# Altium PCB PCB_V1.PcbDoc
Units mm, origin at the board's own origin, x right, y up, seen from the top; angles counter-clockwise.
Board outline 60 x 120 mm, 2 copper layers (Top Layer, Bottom Layer); 99 components, 59 nets, 368 pads, 0 vias.
Unrouted connection lines stored in the file: 219.
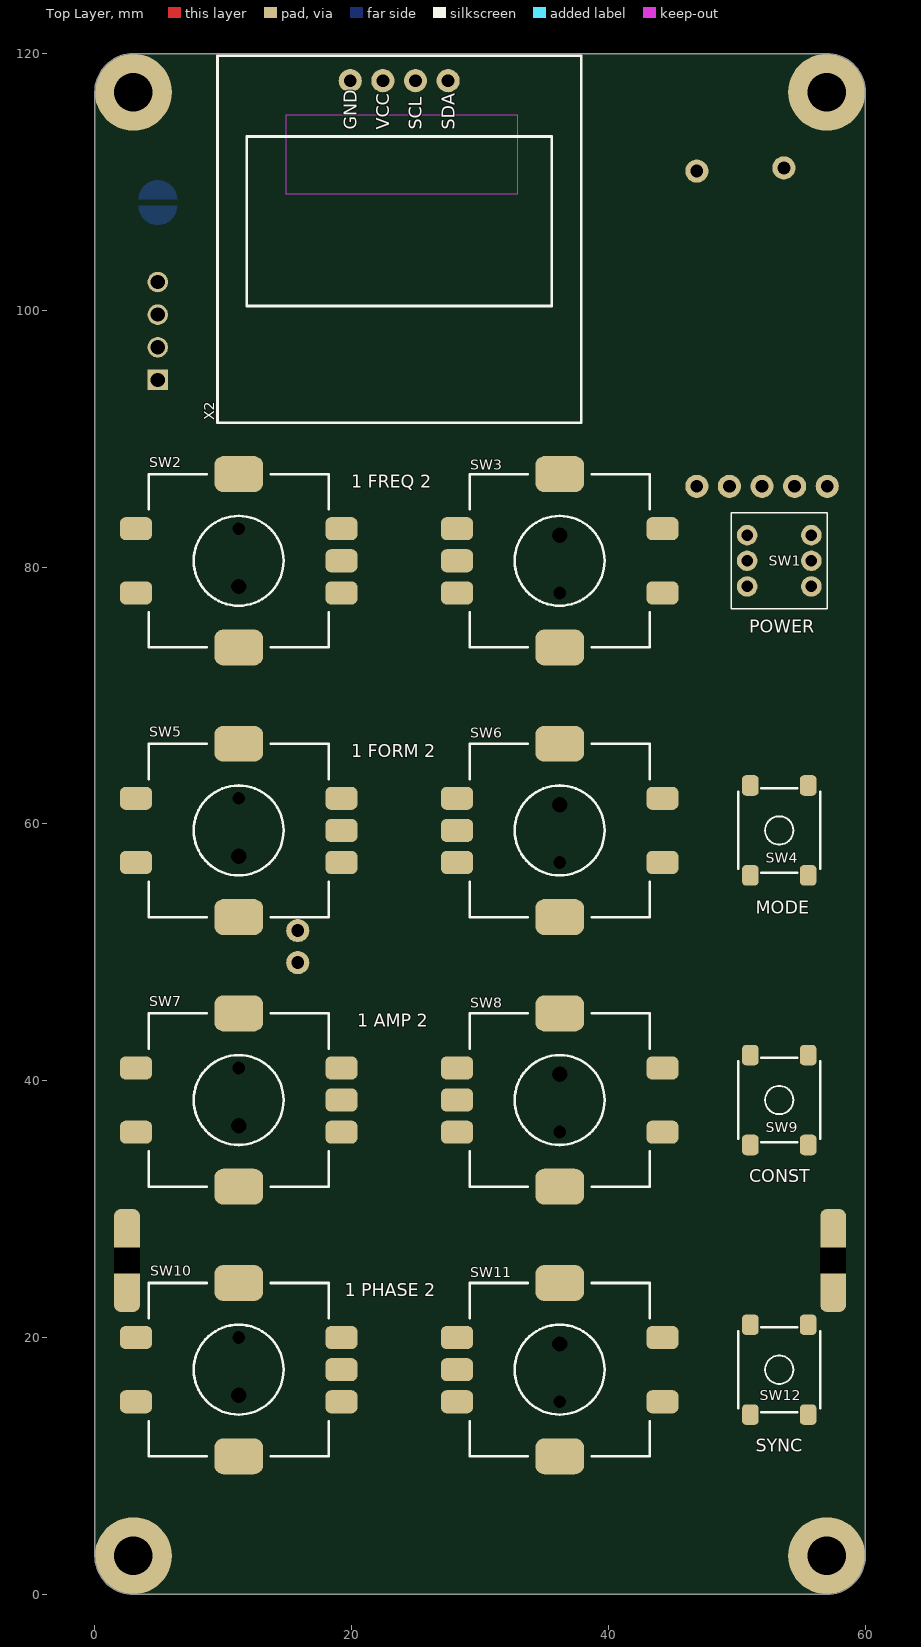
[diagram p0: Top Layer view]
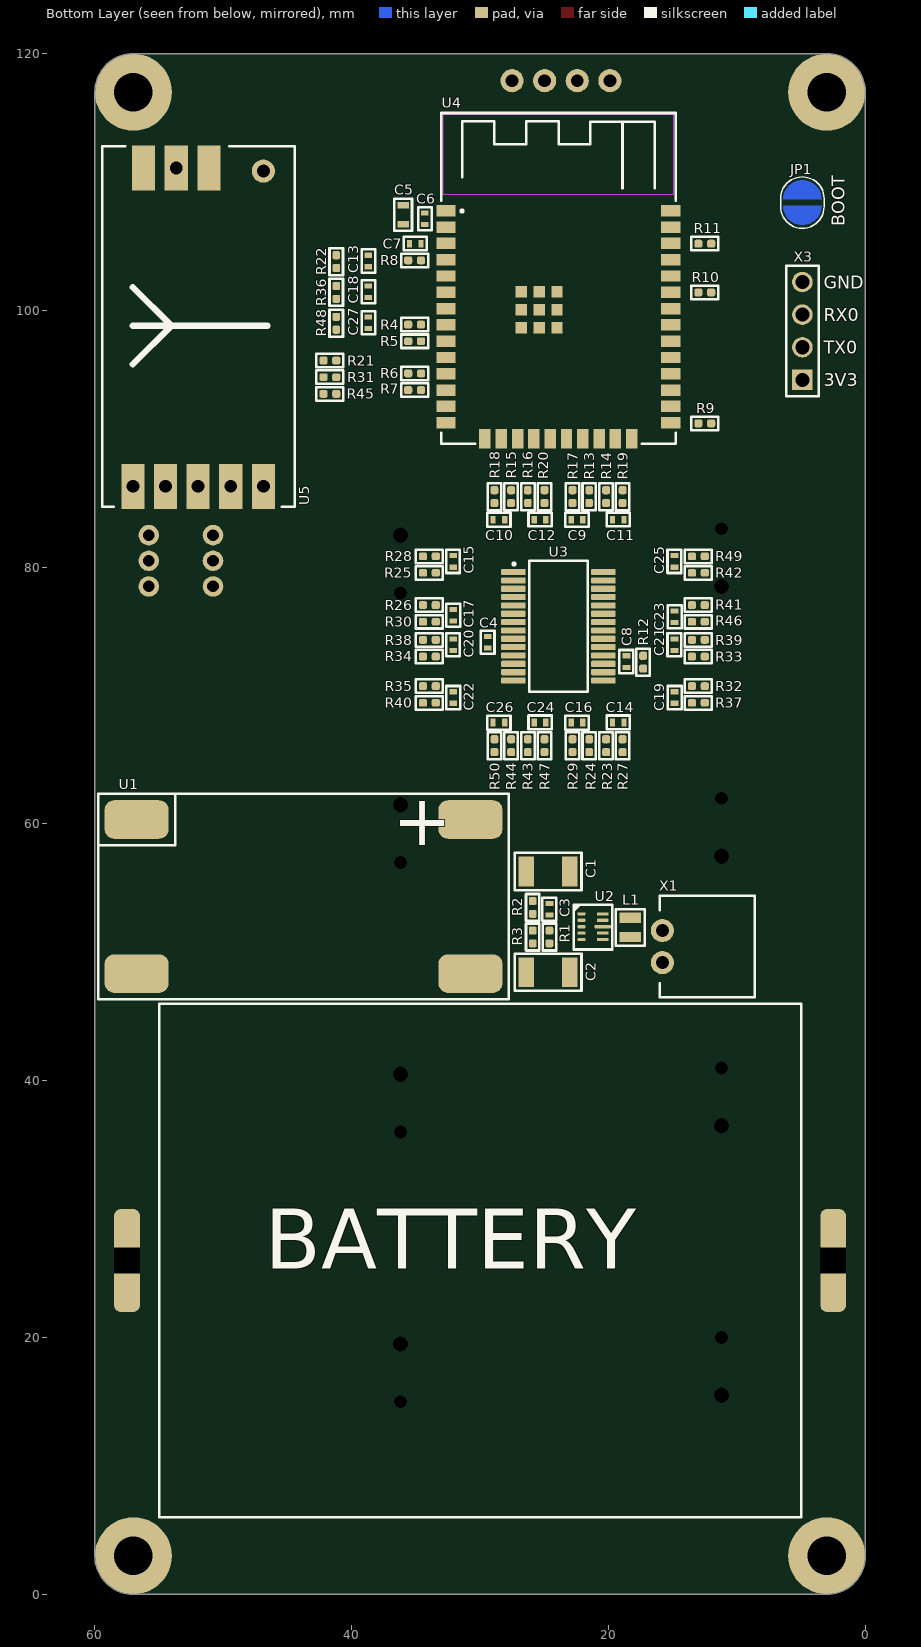
[diagram p1: Bottom Layer view, seen from below]

## Layer stack, top to bottom
Top Solder: solder mask 0.0102, Solder Resist, Dk 3.5
Top Layer: signal copper 0.0356
Dielectric 1: dielectric 0.32, FR-4, Dk 4.8
Bottom Layer: signal copper 0.0356
Bottom Solder: solder mask 0.0102, Solder Resist, Dk 3.5

## Board outline
0,3 0,117 cw(c3,117) 3,120 57,120 cw(c57,117) 60,117 60,3 cw(c57,3) 57,0 3,0 cw(c3,3)

## Design rules (kind name [scope] priority, off if disabled: settings)
Clearance [All] p1: gap=0.254 ignorepadtopadclearanceinfootprint=FALSE except(0: Arc-Hole Track-Hole SMDPad-Hole THPad-Hole Via-Hole Fill-Hole Poly-Hole Region-Hole Text-Hole; 0.1: SMDPad-SMDPad)
Height [All] p1: minheight=0 maxheight=50 prefheight=12.7
PolygonConnect [All] p1: connectstyle=Relief reliefconductorwidth=0.254 reliefentries=4 polygonreliefangle="90 Angle" airgapwidth=0.254
RoutingVias [All] p1: holewidth=0.711 width=1.27 viastyle="Through Hole" minholewidth=0.711 minwidth=1.27 maxholewidth=0.711 maxwidth=1.27
SolderMaskExpansion [All] p1: expansion=0.102 istentingtop=FALSE
Width [All] p1: maxlimit=0.2 minlimit=0.2 preferedwidth=0.2 minimp=50.000000 maximp=50.000000 favimp=50.000000
29 further rules are at their usual default settings.

## Components (designator, comment, footprint, x,y, rotation, side; value= is the part's Value field where it differs from the comment)
C1 "22u" C1210 24.7,56.35 r180 bottom
C2 "22u" C1210 24.7,48.5 r180 bottom
C3 "100n" C0402 24.6,52.9 r90 bottom
C4 "100n" C0402 29.4,73.7 r90 bottom
C5 "1u" C0603 36,108.2 r270 bottom
C6 "100n" C0402 34.3,107.6 r270 bottom
C7 "100n" C0402 35.5,105.2 r180 bottom
C8 "100n" C0402 18.6,72.2 r90 bottom
C9 "100n" C0402 22,83.7 r0 bottom
C10 "100n" C0402 28.081,83.7 r0 bottom
C11 "100n" C0402 19.7,83.7 r180 bottom
C12 "100n" C0402 25.781,83.7 r180 bottom
C13 "100n" C0402 38.7,104.3 r270 bottom
C14 "100n" C0402 19.7,67.9 r180 bottom
C15 "100n" C0402 32.1,80 r90 bottom
C16 "100n" C0402 22,67.9 r0 bottom
C17 "100n" C0402 32.1,76.7 r270 bottom
C18 "100n" C0402 38.7,101.9 r270 bottom
C19 "100n" C0402 14.85,70.3 r270 bottom
C20 "100n" C0402 32.1,73.5 r90 bottom
C21 "100n" C0402 14.85,73.5 r90 bottom
C22 "100n" C0402 32.1,70.3 r270 bottom
C23 "100n" C0402 14.85,76.6 r270 bottom
C24 "100n" C0402 25.781,67.9 r180 bottom
C25 "100n" C0402 14.85,80 r90 bottom
C26 "100n" C0402 28.081,67.9 r0 bottom
C27 "100n" C0402 38.7,99.5 r270 bottom
JP1 "NO" "jumper 3mm" 4.9,108.4 r270 bottom
L1 "0.47u 3A" "INDUCTOR 2x1.6mm VLS-CX" 18.3,52.7 r270 bottom
R1 "56k" R0402 24.6,51.2 r270 bottom
R2 "100k" R0402 25.9,53.5 r90 bottom
R3 "10k" R0402 25.9,51.2 r90 bottom
R4 "4.7k" R0402 35.1,98.9 r0 bottom
R5 "4.7k" R0402 35.1,97.6 r0 bottom
R6 "4.7k" R0402 35.1,95.1 r0 bottom
R7 "4.7k" R0402 35.1,93.8 r0 bottom
R8 "10k" R0402 35.1,103.9 r0 bottom
R9 "10k" R0402 12.5,91.2 r180 bottom
R10 "4.7k" R0402 12.5,101.4 r180 bottom
R11 "4.7k" R0402 12.5,105.2 r180 bottom
R12 "10k" R0402 17.3,72.6 r90 bottom
R13 "10k" R0402 21.5,85.5 r90 bottom
R14 "10k" R0402 20.185,85.5 r90 bottom
R15 "10k" R0402 27.581,85.5 r90 bottom
R16 "10k" R0402 26.281,85.5 r90 bottom
R17 "10k" R0402 22.8,85.5 r90 bottom
R18 "10k" R0402 28.881,85.5 r90 bottom
R19 "10k" R0402 18.9,85.5 r90 bottom
R20 "10k" R0402 24.981,85.5 r90 bottom
R21 "10k" R0402 41.7,96.1 r180 bottom
R22 "10k" R0402 41.2,103.8 r90 bottom
R23 "10k" R0402 20.185,66.1 r270 bottom
R24 "10k" R0402 21.5,66.1 r270 bottom
R25 "10k" R0402 33.95,79.565 r0 bottom
R26 "10k" R0402 33.95,77.05 r0 bottom
R27 "10k" R0402 18.9,66.1 r270 bottom
R28 "10k" R0402 33.95,80.85 r0 bottom
R29 "10k" R0402 22.8,66.1 r270 bottom
R30 "10k" R0402 33.95,75.75 r0 bottom
R31 "10k" R0402 41.7,94.8 r180 bottom
R32 "10k" R0402 13,70.74 r180 bottom
R33 "10k" R0402 13,73.04 r180 bottom
R34 "10k" R0402 33.95,73.04 r0 bottom
R35 "10k" R0402 33.95,70.74 r0 bottom
R36 "10k" R0402 41.2,101.4 r90 bottom
R37 "10k" R0402 13,69.44 r180 bottom
R38 "10k" R0402 33.95,74.34 r0 bottom
R39 "10k" R0402 13,74.34 r180 bottom
R40 "10k" R0402 33.95,69.44 r0 bottom
R41 "10k" R0402 13,77.05 r180 bottom
R42 "10k" R0402 13,79.565 r180 bottom
R43 "10k" R0402 26.281,66.1 r270 bottom
R44 "10k" R0402 27.581,66.1 r270 bottom
R45 "10k" R0402 41.7,93.5 r180 bottom
R46 "10k" R0402 13,75.75 r180 bottom
R47 "10k" R0402 24.981,66.1 r270 bottom
R48 "10k" R0402 41.2,99 r90 bottom
R49 "10k" R0402 13,80.85 r180 bottom
R50 "10k" R0402 28.881,66.1 r270 bottom
SW1 "PB22E07" "PB22E07 7х7х12" 53.3,80.5 r0 top locked
SW2 "EC110S" EC110S(ЭНКОДЕР) 11.2,80.5 r90 top locked
SW3 "EC110S" EC110S(ЭНКОДЕР) 36.2,80.5 r270 top locked
SW4 "KLS7" "SMT Tactile Switch (6mm x 6mm)" 53.3,59.5 r90 top locked
SW5 "EC110S" EC110S(ЭНКОДЕР) 11.2,59.5 r90 top locked
SW6 "EC110S" EC110S(ЭНКОДЕР) 36.2,59.5 r270 top locked
SW7 "EC110S" EC110S(ЭНКОДЕР) 11.2,38.5 r90 top locked
SW8 "EC110S" EC110S(ЭНКОДЕР) 36.2,38.5 r270 top locked
SW9 "KLS7" "SMT Tactile Switch (6mm x 6mm)" 53.3,38.5 r90 top locked
SW10 "EC110S" EC110S(ЭНКОДЕР) 11.2,17.5 r90 top locked
SW11 "EC110S" EC110S(ЭНКОДЕР) 36.2,17.5 r270 top locked
SW12 "KLS7" "SMT Tactile Switch (6mm x 6mm)" 53.3,17.5 r90 top locked
U1 "IP2312" "IP2312 Modul" 43.75,54.35 r180 bottom
U2 "TPS63802" VSON-HR-10(3x2) 22.1,53 r180 bottom
U3 "MCP23017" SSOP-28N 23.9,75.4 r180 bottom
U4 "ESP32-WROOM-32E" ESP32­WROOM­32E 23.905,102.501 r180 bottom
U5 "HC-12" HC-12(Модуль) 57.04,86.3 r90 bottom
X1 "Sold. pads for Li-Pol" "CWF-2R (DS1069-2 MR)" 15.8,51.7 r270 bottom
X2 "Pins SSD1306 I2C" "SSD1306 27.5x27.8 NO GABARIT" 23.7,105.5 r0 top locked
X3 "PLS-4 UART" PLS-4 4.9,98.4 r90 bottom

## Footprints (in the part's own frame and the unit in brackets; to place one, negate y for a bottom-side part, rotate by r counter-clockwise, add the part's x,y. Pads: shape width x height; smd on the part's side, far side on the other; paste and mask are expansions set on the pad)
C0402 [mm]
  rect 0.4x0.6 smd: 1(0,0) 2(0.9,0)
  silkscreen extent -0.45,-0.53 1.35,0.55, body extent -0.07,-0.27 0.98,0.28, height 0.55
C0603 [mm]
  rect 0.5x0.9 smd: 1(0,0) 2(1.5,0)
  silkscreen extent -0.5,-0.7 2,0.7, body extent -0.13,-0.45 1.62,0.42, height 0.95
C1210 [mm]
  rect 1.2x2.3 smd: 1(-1.7,-0.05) 2(1.7,-0.05)
  silkscreen extent -2.6,-1.5 2.6,1.4, body extent -1.7,-1.2 1.7,1.1, height 2.7
"CWF-2R (DS1069-2 MR)" [mm]
  round 1.8 hole 1: 1(2.5,0) 2(0,0)
  silkscreen extent -2.7,-0.2 5.2,7.2, body extent -2.5,-0.3 4.9,7.2, height 5.7
EC110S(ЭНКОДЕР) [mm]
  rrect50% 2.8x3.8 smd: 0(-6.75,0) 0(6.75,0)
  round 0 hole 1.2: 0(-2,0)
  round 0 hole 1: 0(2.5,0)
  rrect50% 1.8x2.5 smd: 1(-2.5,-8) 2(0,-8) 3(2.5,-8) 4(2.5,8) 5(-2.5,8)
  silkscreen extent -6.75,-7 6.75,7, body extent -7.5,-8.5 7.5,8.5, height 15
ESP32­WROOM­32E [mil]
  rect 59x35 smd paste+0 mask+0: 1(-344.5,207.1) 2(-344.5,157.1) 3(-344.5,107.1) 4(-344.5,57.1) 5(-344.5,7.1) 6(-344.5,-42.9) 7(-344.5,-92.9) 8(-344.5,-142.9) 9(-344.5,-192.9) 10(-344.5,-242.9) 11(-344.5,-292.9) 12(-344.5,-342.9) 13(-344.5,-392.9) 14(-344.5,-442.9) 25(344.5,-442.9) 26(344.5,-392.9) 27(344.5,-342.9) 28(344.5,-292.9) 29(344.5,-242.9) 30(344.5,-192.9) 31(344.5,-142.9) 32(344.5,-92.9) 33(344.5,-42.9) 34(344.5,7.1) 35(344.5,57.1) 36(344.5,107.1) 37(344.5,157.1) 38(344.5,207.1)
  rect 35x59 smd paste+0 mask+0: 15(-225,-492.15) 16(-175,-492.15) 17(-125,-492.15) 18(-75,-492.15) 19(-25,-492.15) 20(25,-492.15) 21(75,-492.15) 22(125,-492.15) 23(175,-492.15) 24(225,-492.15)
  rect 35x35 smd paste+0 mask+0: 39(-114.2,-152) 39(-114.2,-96.9) 39(-114.2,-41.8) 39(-59.1,-152) 39(-59.1,-96.9) 39(-59.1,-41.8) 39(-4,-152) 39(-4,-96.9) 39(-4,-41.8)
  Keep-Out Layer region: 354.5,258 354.5,502 -354.5,502 -354.5,258
  silkscreen extent -359,-507 360,507, body extent -354,-502 354,502, height 128
HC-12(Модуль) [mm]
  round 1.8 hole 1: 1(0,0) 2(0,-2.54) 3(0,-5.08) 4(0,-7.62) 5(0,-10.16) 6(24.8,-3.38)
  rect 3.5x1.8 smd: 1(0,0) 2(0,-2.54) 2(24.8,-5.92) 2(24.8,-0.84) 3(0,-5.08) 4(0,-7.62) 5(0,-10.16) 6(24.8,-3.38)
  round 1.8 hole 1 unplated: 2(24.55,-10.16)
  silkscreen extent -1.6,-12.6 26.5,2.4, body extent -1.4,-12.3 26,2.1, height 2.6
"INDUCTOR 2x1.6mm VLS-CX" [mm]
  rect 0.8x1.7 smd: 1(0,0) 2(1.5,0)
  silkscreen extent -0.67,-1.12 2.17,1.12, body extent -0.25,-0.8 1.75,0.8, height 1
"IP2312 Modul" [mm]
  rrect50% 5x3 smd: 1(-13,6) 2(-13,-6) 3(13,-6) 4(13,6)
  silkscreen extent -16,-8 16,8, body extent -15.5,-7.5 15.5,7.5, height 5
"jumper 3mm" [mil]
  round 1 smd: 1(-39.37,0) 2(39.37,0)
  Top Layer region: -9.84,59.06 -9.84,-59.06 -32.44,-54.56 -51.6,-41.76 -64.4,-22.6 -68.9,0 -68.9,0 -60.99,29.53 -39.37,51.14 -9.84,59.05
  Top Layer region: 9.84,-59.05 9.84,59.06 32.44,54.56 51.6,41.76 64.4,22.6 68.9,0 68.9,0 60.99,-29.53 39.37,-51.14 9.84,-59.05
  silkscreen extent -79,-67 79,67
"PB22E07 7х7х12" [mm]
  round 1.6 hole 0.9: 1(-2.5,2) 2(-2.5,0) 3(-2.5,-2) 4(2.5,2) 5(2.5,0) 6(2.5,-2)
  silkscreen extent -3.75,-3.75 3.75,3.75, body extent -3.5,-3.5 3.5,3.5, height 12.6
PLS-4 [mm]
  rect 1.6x1.6 hole 1.1: 1(-3.81,0)
  round 1.6 hole 1.1: 2(-1.27,0) 3(1.27,0) 4(3.81,0)
  silkscreen extent -5.08,-1.27 5.08,1.27, body extent -5.08,-1.27 5.08,1.27, height 8.5
R0402 [mm]
  rrect50% 0.635x0.61 smd: 1(-0.5,0) 2(0.5,0)
  silkscreen extent -1.05,-0.53 1.05,0.53, body extent -0.5,-0.25 0.5,0.25, height 0.35
"SMT Tactile Switch (6mm x 6mm)" [mm] "SMT Tactile Switch (6mm x 6mm)"
  rrect50% 1.6x1.3 smd: 1(-3.5,-2.25) 2(-3.5,2.25) 3(3.5,2.25) 4(3.5,-2.25)
  silkscreen extent -3.3,-3.2 3.3,3.2, body extent -4,-3 4,3, height 4.3
"SSD1306 27.5x27.8 NO GABARIT" [mm]
  round 1.8 hole 1: 1(3.81,12.392) 2(1.27,12.392) 3(-1.27,12.392) 4(-3.81,12.392)
  silkscreen extent -14.15,-14.25 14.18,14.35, body extent -13.75,-13.9 13.75,13.9, height 3.2
SSOP-28N [mm]
  rrect25% 1.9x0.48 smd mask+0: 1(-3.505,4.225) 2(-3.505,3.575) 3(-3.505,2.925) 4(-3.505,2.275) 5(-3.505,1.625) 6(-3.505,0.975) 7(-3.505,0.325) 8(-3.505,-0.325) 9(-3.505,-0.975) 10(-3.505,-1.625) 11(-3.505,-2.275) 12(-3.505,-2.925) 13(-3.505,-3.575) 14(-3.505,-4.225) 15(3.505,-4.225) 16(3.505,-3.575) 17(3.505,-2.925) 18(3.505,-2.275) 19(3.505,-1.625) 20(3.505,-0.975) 21(3.505,-0.325) 22(3.505,0.325) 23(3.505,0.975) 24(3.505,1.625) 25(3.505,2.275) 26(3.505,2.925) 27(3.505,3.575) 28(3.505,4.225)
  silkscreen extent -3.55,-5.1 2.29,5.1, body extent -3.9,-5.1 3.9,5.1, height 2
VSON-HR-10(3x2) [mm]
  rrect50% 0.6x0.25 smd: 1(0,0) 2(0,-0.5) 3(0,-1) 4(0,-1.5) 5(0,-2)
  rrect50% 0.9x0.25 smd: 6(1.65,-2) 7(1.65,-1.5) 9(1.65,-0.5) 10(1.65,0)
  rrect50% 1.3x0.25 smd: 8(1.65,-1)
  silkscreen extent -0.6,-2.78 2.4,0.72, body extent -0.1,-2.5 1.9,0.5, height 1

## Part data
C1 C2: library part Capacitor, "22 мкФ X7R 10% 25В 1210, GRM32ER71E226KE15L"
C3 C4 C6 C7 C8 C9 C10 C11 C12 C13 C14 C15 C16 C17 C18 C19 C20 C21 C22 C23 C24 C25 C26 C27: library part Capacitor, "0.1 мкФ X7R 25В 10% 0402, GRM155R71E104KE14D"
C5: library part Capacitor, "1 мкФ X7R 25В 10% 0603, GCM188R71E105KA64D"
JP1: library part "Jumper (Normal Open)"
L1: library part Inductance, "VLS201610CX-R47M-1, 0.47мкГн, 3.16А"
R1 R2 R3 R4 R5 R6 R7 R8 R9 R10 R11 R12 R13 R14 R15 R16 R17 R18 R19 R20 R21 R22 R23 R24 R25 R26 R27 R28 R29 R30 R31 R32 R33 R34 R35 R36 R37 R38 R39 R40 R41 R42 R43 R44 R45 R46 R47 R48 R49 R50: library part Resistor, "0402"
SW1: library part "Switch Button (Normal Open)", "PB22E07 с фиксацией 7x7x12 mm"
SW2 SW3 SW5 SW6 SW7 SW8 SW10 SW11: library part "Encoder (Incremental, with Button)", "Incremental Encoder with button / EC110S 20/20 10mm"
SW4 SW9 SW12: library part "Switch Button (Normal Open)", "KLS7-TS6604-4.3-180 (IT-1102S) 6х6х4.3мм"
U1: library part MOD_Charger_IP2312, "Impulse charger without protection"
U2: library part IC_ImpRegulator_TPS63802, "Integral Buck-Boost Regulator 2A out"
U3: library part IC_PortsExp_MCP23017, "16-Bit I/O Expander with Serial Interface"
U4: library part MOD_ESP32-WROOM-32
U5: library part MOD_RadioMod_HC-12, "Radio module 433MHz UART Interface"
X1: library part "Terminal block (2-pin)"
X2 X3: library part "Terminal block (4-pin)"

## Free pads (board coordinates)
  round 6 hole 3: 0(3,3) 0(3,117) 0(57,3) 0(57,117)
  rrect50% 2x8 hole 2 square: 1(2.5,26) 1(57.5,26)

## Nets (pads, with @x,y where several pads share a name; then routed paths per layer and width w, separated by ;. In a path a pad name is that pad's centre, name@x,y a point inside that pad or via, vN(x,y) a via of type N, cw(c..) or ccw(c..) an arc to the next point about the centre after c; other vN are vias at no path point)
3.3V: C2.2 C4.2 C5.2 C6.2 R1.2 R4.2 R5.2 R6.2 R7.2 R8.2 R9.2 R10.2 R11.2 R12.1 R13.1 R14.1 R15.1 R16.1 R21.2 R23.1 R24.1 R25.1 R26.1 R31.2 R32.1 R33.1 R34.1 R35.1 R41.1 R42.1 R43.1 R44.1 R45.2 U2.6 U3.9 U4.2 U5.1 X2.3 X3.1
BAT+: C1.2 SW1.2 U1.4 U2.10 X1.1
BTN_CONST: C18.2 R36.1 U4.5
BTN_MODE: C13.2 R22.1 U4.4
BTN_SYNC: C27.2 R48.1 U4.6
DISP_SCL_(SCL0): R11.1 U4.36 X2.2
DISP_SDA_(SDA0): R10.1 U4.33 X2.1
ENC_L1A: C9.2 R17.1 U3.21
ENC_L1B: C11.2 R19.1 U3.22
ENC_L2A: C14.2 R27.1 U3.23
ENC_L2B: C16.2 R29.1 U3.24
ENC_L3A: C19.2 R37.1 U3.25
ENC_L3B: C21.2 R39.1 U3.26
ENC_L4A: C23.2 R46.1 U3.27
ENC_L4B: C25.2 R49.1 U3.28
ENC_R1A: C10.2 R18.1 U3.1
ENC_R1B: C12.2 R20.1 U3.2
ENC_R2A: C15.2 R28.1 U3.3
ENC_R2B: C17.2 R30.1 U3.4
ENC_R3A: C20.2 R38.1 U3.5
ENC_R3B: C22.2 R40.1 U3.6
ENC_R4A: C24.2 R47.1 U3.7
ENC_R4B: C26.2 R50.1 U3.8
GND: C1.1 C2.1 C3.1 C4.1 C5.1 C6.1 C7.1 C8.1 C9.1 C10.1 C11.1 C12.1 C13.1 C14.1 C15.1 C16.1 C17.1 C18.1 C19.1 C20.1 C21.1 C22.1 C23.1 C24.1 C25.1 C26.1 C27.1 JP1.1 pad.0 R2.1 R3.1 SW2.2 SW3.2 SW4.1 SW5.2 SW6.2 SW7.2 SW8.2 SW9.1 SW10.2 SW11.2 SW12.1 U1.3 U2.2 U2.3 U2.8 U3.10 U3.15 U3.16 U3.17 U4.1 U4.15 U4.38 U4.39 U5.2 X1.2 X2.4 X3.4
MCP_INTA: R6.1 U3.20 U4.11
MCP_INTB: R7.1 U3.19 U4.12
MCP_SCK_(SCL1): R5.1 U3.12 U4.9
MCP_SDA_(SDA1): R4.1 U3.13 U4.8
NetC3_2: C3.2 R2.2 SW1.1 U2.1
NetC7_2: C7.2 R8.1 U4.3
NetC8_2: C8.2 R12.2 U3.18
NetJP1_2: JP1.2 R9.1 U4.25
NetL1_1: L1.1 U2.9
NetL1_2: L1.2 U2.7
NetR1_1: R1.1 R3.2 U2.4
NetR13_2: R13.2 R17.2 SW2.1
NetR14_2: R14.2 R19.2 SW2.3
NetR15_2: R15.2 R18.2 SW3.1
NetR16_2: R16.2 R20.2 SW3.3
NetR21_1: R21.1 R22.2 SW4.2
NetR23_2: R23.2 R27.2 SW5.1
NetR24_2: R24.2 R29.2 SW5.3
NetR25_2: R25.2 R28.2 SW6.1
NetR26_2: R26.2 R30.2 SW6.3
NetR31_1: R31.1 R36.2 SW9.2
NetR32_2: R32.2 R37.2 SW7.1
NetR33_2: R33.2 R39.2 SW7.3
NetR34_2: R34.2 R38.2 SW8.1
NetR35_2: R35.2 R40.2 SW8.3
NetR41_2: R41.2 R46.2 SW10.1
NetR42_2: R42.2 R49.2 SW10.3
NetR43_2: R43.2 R47.2 SW11.1
NetR44_2: R44.2 R50.2 SW11.3
NetR45_1: R45.1 R48.2 SW12.2
RAD_RXD_(TX2): U4.28 U5.3
RAD_SET: U4.30 U5.5
RAD_TXD_(RX2): U4.27 U5.4
RX0: U4.34 X3.3
TX0: U4.35 X3.2
pads on no net: SW1.3 SW1.4 SW1.5 SW1.6 SW2.0 SW2.4 SW2.5 SW3.0 SW3.4 SW3.5 SW4.3 SW4.4 SW5.0 SW5.4 SW5.5 SW6.0 SW6.4 SW6.5 SW7.0 SW7.4 SW7.5 SW8.0 SW8.4 SW8.5 SW9.3 SW9.4 SW10.0 SW10.4 SW10.5 SW11.0 SW11.4 SW11.5 SW12.3 SW12.4 U1.1 U1.2 U2.5 U3.11 U3.14 U4.7 U4.10 U4.13 U4.14 U4.16 U4.17 U4.18 U4.19 U4.20 U4.21 U4.22 U4.23 U4.24 U4.26 U4.29 U4.31 U4.32 U4.37 U5.6

## Silkscreen, mask and mechanical layers (free items; w line width, h text height)
Top Overlay:
  text "1 FREQ 2" at 19.951,86.2 h1
  text "POWER" at 50.967,74.9 h1
  text "1 FORM 2" at 19.951,65.2 h1
  text "MODE" at 51.467,53 h1
  text "1 AMP 2" at 20.451,44.2 h1
  text "CONST" at 50.967,32.1 h1
  text "1 PHASE 2" at 19.451,23.2 h1
  text "SYNC" at 51.467,11.1 h1
Bottom Overlay:
  lines w0.2: 5,6 5,46 55,46 55,6 5,6
  text "BOOT" at 1.6,106.567 h1 r270
  text "GND" at 3.233,101.7 h1
  text "RX0" at 3.233,99.16 h1
  text "TX0" at 3.233,96.62 h1
  text "3V3" at 3.233,94.08 h1
  text "BATTERY" at 46.765,23.804 h8
Mechanical 1:
  the board outline again, w0.203

## Text inside footprints (layer, text, board x,y; h text height)
U1: Bottom Overlay "+" at 36.783,58.351 h4
X2: Top Overlay "SDA" at 28.01,114.073 h1 r90; Top Overlay "SCL" at 25.47,114.073 h1 r90; Top Overlay "VCC" at 22.93,114.073 h1 r90; Top Overlay "GND" at 20.39,114.073 h1 r90